# Altium PCB eMMC_SD.PcbDoc
Units mm, origin at the board's own origin, x right, y up, seen from the top; angles counter-clockwise.
Board outline 59.5 x 26 mm, 2 copper layers (Top Layer, Bottom Layer); 20 components, 17 nets, 152 pads, 31 vias.
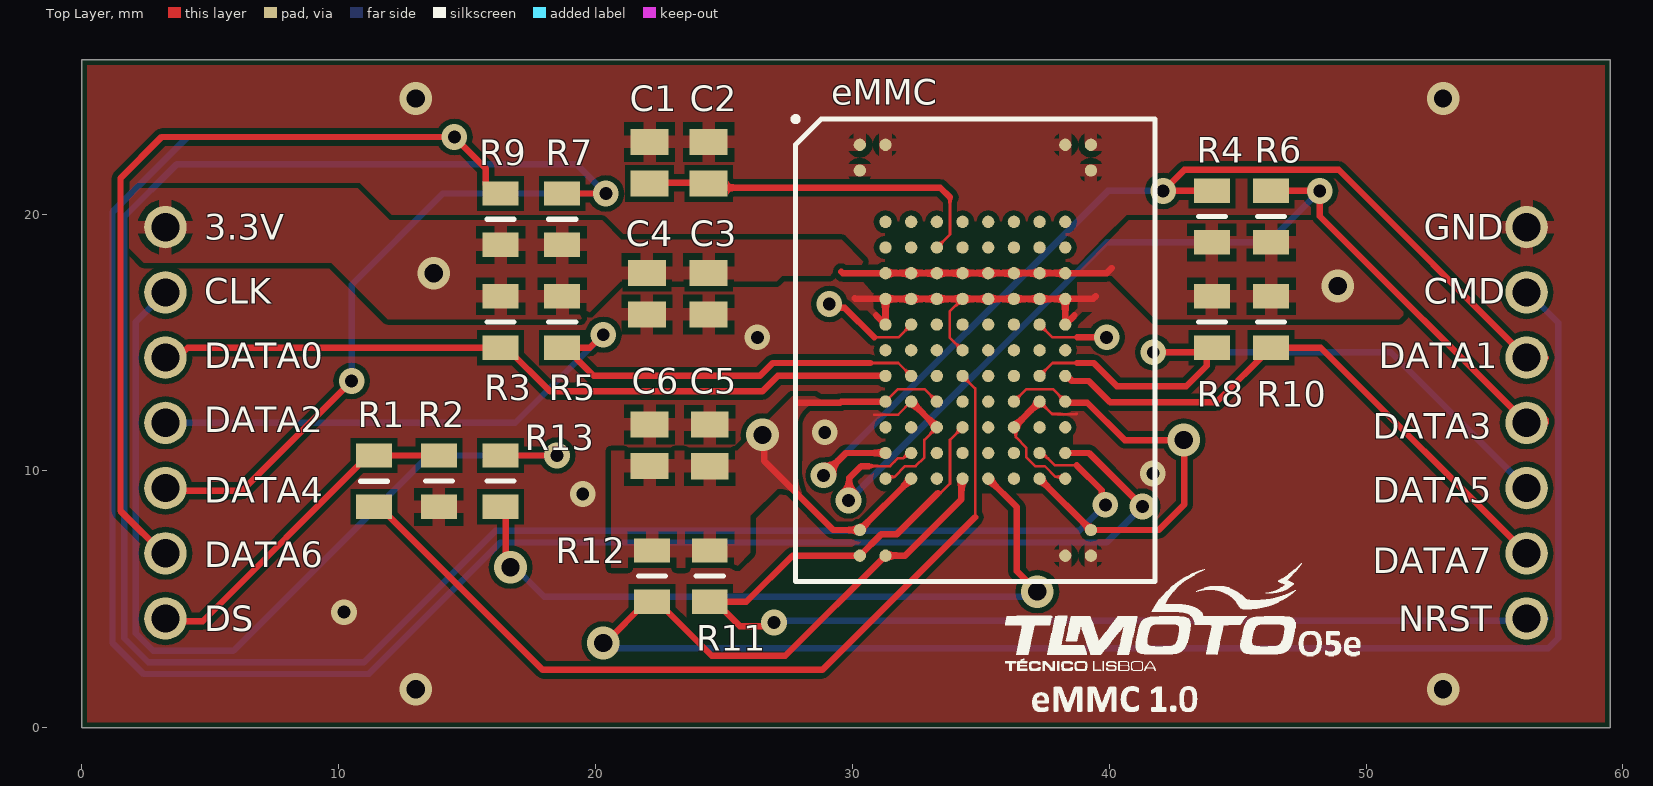
[diagram p0: Top Layer view]
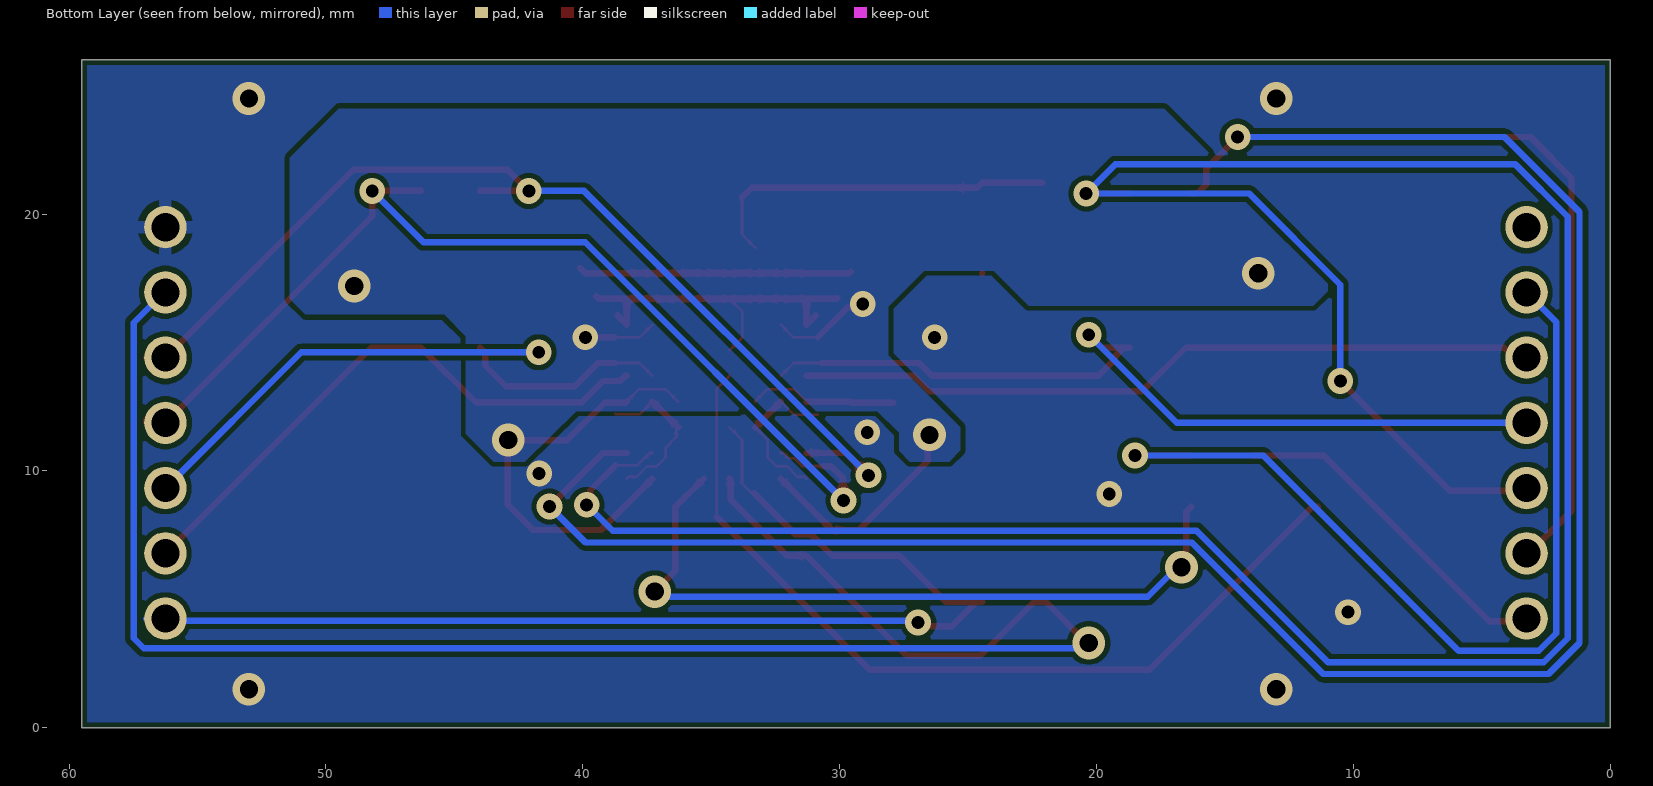
[diagram p1: Bottom Layer view, seen from below]
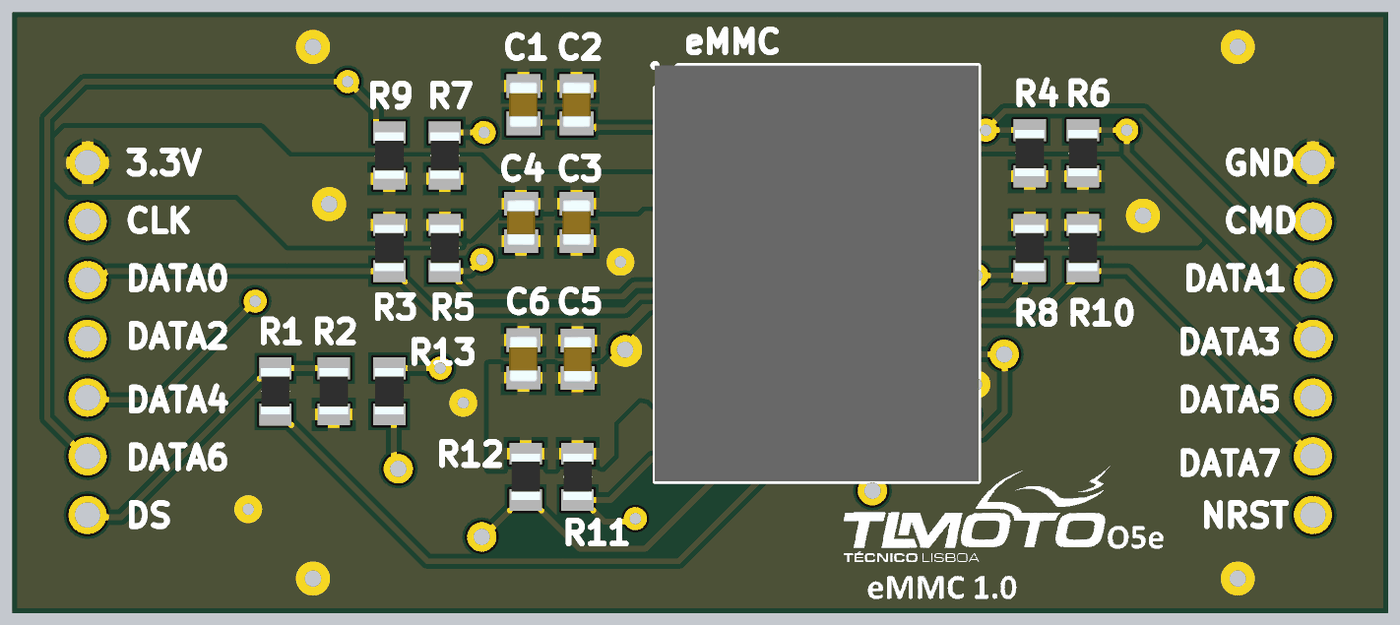
[diagram p2: 3D render of the assembled board from above, using the file's embedded part models]

## Layer stack, top to bottom
Top Solder: solder mask 0.0102, Solder Resist, Dk 3.5
Top Layer: signal copper 0.0356
Dielectric 1: dielectric 0.32, FR-4, Dk 4.8
Bottom Layer: signal copper 0.0356
Bottom Solder: solder mask 0.0102, Solder Resist, Dk 3.5

## Board outline
0,0 59.5,0 59.5,26 0,26

## Design rules (kind name [scope] priority, off if disabled: settings)
BoardOutlineClearance [All] p1: gap=0.2 ignorepadtopadclearanceinfootprint=FALSE except(0.4: Arc-SplitBarrior Arc-SplitContinuation Track-SplitBarrior Track-SplitContinuation SMDPad-SplitBarrior SMDPad-SplitContinuation THPad-SplitBarrior THPad-SplitContinuation Via-SplitBarrior Via-SplitContinuation Fill-SplitBarrior Fill-SplitContinuation Poly-SplitBarrior Poly-SplitContinuation Region-SplitBarrior Region-SplitContinuation Text-SplitBarrior Text-SplitContinuation)
Clearance "Clearance Bottom Layer" [OnLayer('Bottom Layer')] p1: gap=0.203 ignorepadtopadclearanceinfootprint=TRUE except(0.254: Arc-Text Track-Text SMDPad-Text THPad-Text Via-Text Fill-Text Poly-Text Region-Text Text-Text)
Clearance "Clearance Top Layer" [OnLayer('Top Layer')] p2: gap=0.203 ignorepadtopadclearanceinfootprint=TRUE except(0.196: Arc-SMDPad Track-SMDPad; 0.254: Arc-Text Track-Text SMDPad-Text THPad-Text Via-Text Fill-Text Poly-Text Region-Text Text-Text)
Clearance [All] p3: gap=0.2 ignorepadtopadclearanceinfootprint=FALSE except(0.089: Arc-Arc Arc-Track Arc-SMDPad Track-Track Track-SMDPad SMDPad-SMDPad; 0.127: Arc-Via Track-Via SMDPad-Via THPad-Via Via-Via; 0.254: Arc-Text Track-Text SMDPad-Text THPad-Text Via-Text Fill-Text Poly-Text Region-Text Text-Text)
DiffPairsRouting [All] p1: maxlimit=0.254 minlimit=0.254 mostfreqgap=0.254 toplayer_minwidth=0.25 toplayer_maxwidth=0.381 toplayer_prefwidth=0.381 bottomlayer_minwidth=0.25 bottomlayer_maxwidth=0.381 bottomlayer_prefwidth=0.381 maxuncoupledlength=12.7
HoleSize [All] p1: absolutevalues=TRUE maxlimit=6.3 minlimit=0.2 maxpercent=80.000 minpercent=20.000
MinimumAnnularRing [All] p1: minimumring=0.076
MinimumSolderMaskSliver [All] p1: minsoldermaskwidth=0.1
PolygonConnect PolygonConnect_1 [All] p1: thpad.connectstyle=Relief thpad.reliefconductorwidth=0.508 thpad.reliefentries=4 thpad.polygonreliefangle="90 Angle" thpad.airgapwidth=0.254 smdpad.connectstyle=Relief smdpad.reliefconductorwidth=0.508 smdpad.reliefentries=4 smdpad.polygonreliefangle="90 Angle" smdpad.airgapwidth=0.254 via.connectstyle=Direct via.reliefconductorwidth=0.508 via.reliefentries=4 via.polygonreliefangle="90 Angle" via.airgapwidth=0.254
RoutingCorners [All] p1: cornerstyle=Round minsetback=2.54 maxsetback=2.54
RoutingVias [All] p1: holewidth=0.5 width=1 viastyle="Through Hole" minholewidth=0.2 minwidth=0.45 maxholewidth=1 maxwidth=2
SilkToSilkClearance [All] p1: silktosilkclearance=0.1
SilkToSolderMaskClearance [IsPad] p1: minsilkscreentomaskgap=0.1 clearancetoexposedcopper=TRUE
SolderMaskExpansion [All] p1: expansion=0.102 istentingtop=FALSE
Width [All] p1: maxlimit=2.54 minlimit=0.1 preferedwidth=0.25 minimp=50.000000 maximp=50.000000 favimp=50.000000
24 further rules are at their usual default settings.

## Components (designator, comment, footprint, x,y, rotation, side; value= is the part's Value field where it differs from the comment)
C1 "100nF" CAPC2012X140N 22.1,22 r270 top
C2 "1uF" CAPC2012X140N 24.4,22 r270 top
C3 "100nF" CAPC2012X140N 24.4,16.9 r90 top
C4 "2.2uF" CAPC2012X140N 22,16.9 r90 top
C5 "100nF" CAPC2012X140N 24.445,10.99 r90 top
C6 "2.2uF" CAPC2012X140N 22.1,11 r90 top
eMMC "MTFC8GAMALNA-AAT_TR" BGA100C100P10X17_1400X1800X120 34.788,14.697 r0 top (schematic designator IC1)
R1 "22" RESC2012X60N 11.375,9.597 r90 top
R2 "50k" RESC2012X60N 13.9,9.6 r90 top
R3 "50k" RESC2012X60N 16.3,15.8 r90 top
R4 "50k" RESC2012X60N 44,19.9 r270 top
R5 "50k" RESC2012X60N 18.7,15.8 r90 top
R6 "50k" RESC2012X60N 46.3,19.9 r270 top
R7 "50k" RESC2012X60N 18.7,19.8 r270 top
R8 "50k" RESC2012X60N 44,15.8 r90 top
R9 "50k" RESC2012X60N 16.3,19.8 r270 top
R10 "50k" RESC2012X60N 46.3,15.8 r90 top
R11 "50k" RESC2012X60N 24.445,5.9 r90 top
R12 "10k" RESC2012X60N 22.2,5.9 r90 top
R13 "22" RESC2012X60N 16.3,9.6 r90 top

## Footprints (in the part's own frame and the unit in brackets; to place one, negate y for a bottom-side part, rotate by r counter-clockwise, add the part's x,y. Pads: shape width x height; smd on the part's side, far side on the other; paste and mask are expansions set on the pad)
BGA100C100P10X17_1400X1800X120 [mm]
  round 0.48 smd: A1(-4.5,8) A2(-3.5,8) A9(3.5,8) A10(4.5,8) B1(-4.5,7) B10(4.5,7) D2(-3.5,5) D3(-2.5,5) D4(-1.5,5) D5(-0.5,5) D6(0.5,5) D7(1.5,5) D8(2.5,5) D9(3.5,5) E2(-3.5,4) E3(-2.5,4) E4(-1.5,4) E5(-0.5,4) E6(0.5,4) E7(1.5,4) E8(2.5,4) E9(3.5,4) F2(-3.5,3) F3(-2.5,3) F4(-1.5,3) F5(-0.5,3) F6(0.5,3) F7(1.5,3) F8(2.5,3) F9(3.5,3) G2(-3.5,2) G3(-2.5,2) G4(-1.5,2) G5(-0.5,2) G6(0.5,2) G7(1.5,2) G8(2.5,2) G9(3.5,2) H2(-3.5,1) H3(-2.5,1) H4(-1.5,1) H5(-0.5,1) H6(0.5,1) H7(1.5,1) H8(2.5,1) H9(3.5,1) J2(-3.5,0) J3(-2.5,0) J4(-1.5,0) J5(-0.5,0) J6(0.5,0) J7(1.5,0) J8(2.5,0) J9(3.5,0) K2(-3.5,-1) K3(-2.5,-1) K4(-1.5,-1) K5(-0.5,-1) K6(0.5,-1) K7(1.5,-1) K8(2.5,-1) K9(3.5,-1) L2(-3.5,-2) L3(-2.5,-2) L4(-1.5,-2) L5(-0.5,-2) L6(0.5,-2) L7(1.5,-2) L8(2.5,-2) L9(3.5,-2) M2(-3.5,-3) M3(-2.5,-3) M4(-1.5,-3) M5(-0.5,-3) M6(0.5,-3) M7(1.5,-3) M8(2.5,-3) M9(3.5,-3) N2(-3.5,-4) N3(-2.5,-4) N4(-1.5,-4) N5(-0.5,-4) N6(0.5,-4) N7(1.5,-4) N8(2.5,-4) N9(3.5,-4) P2(-3.5,-5) P3(-2.5,-5) P4(-1.5,-5) P5(-0.5,-5) P6(0.5,-5) P7(1.5,-5) P8(2.5,-5) P9(3.5,-5) T1(-4.5,-7) T10(4.5,-7) U1(-4.5,-8) U2(-3.5,-8) U9(3.5,-8) U10(4.5,-8)
  silkscreen extent -7.1,-9 7,9.1, body extent -7,-9 7,9, height 1.2
CAPC2012X140N [mm]
  rect 1.02x1.47 smd: 1(-0.81,0) 2(0.81,0)
  body extent -1,-0.63 1,0.63, height 1.4
RESC2012X60N [mm]
  rect 0.95x1.4 smd: 1(-1,0) 2(1,0)
  silkscreen extent 0,-0.53 0,0.53, body extent -1,-0.63 1,0.63, height 0.6

## Part data
C1 C2 C3 C4 C5 C6: library part CMP-002-000003-1, "Capacitor", Arrow Part Number=08055C105K4Z2A, Manufacturer_Name="Kyocera AVX", Mouser Part Number=581-08055C105K4Z2A, Arrow Price/Stock=https://www.arrow.com/en/products/08055c105k4z2a/avx, Datasheet Link=https://4donline.ihs.com/images/VipMasterIC/IC/AVXC/AVXC-S-A0008637974/AVXC-S-A0008637974-1.pdf?hkey=6D3A4C79FDBF58556ACFDE234799DDF0, Design Item ID=08055C105K4Z2A, Height=1.4mm, Manufacturer_Part_Number=08055C105K4Z2A, Mouser Price/Stock=https://www.mouser.co.uk/ProductDetail/KYOCERA-AVX/08055C105K4Z2A?qs=0%2F2GmT7MRM8qZ4y6WMRpDA%3D%3D, Source=SamacSys.SchLib
eMMC: library part CMP-008-000016-1, "Multi Media Card Controller and NAND Flash e.MMC Memory", Arrow Part Number="MTFC8GAMALNA-AAT TR", Manufacturer_Name=Micron, Mouser Part Number=340-354324-REEL, Arrow Price/Stock=null?region=nac, Datasheet Link=https://kr.mouser.com/datasheet/2/671/micron_technology_mict-s-a0006806196-1-1759129.pdf, Design Item ID=MTFC8GAMALNA-AAT_TR, Height=1.2mm, Manufacturer_Part_Number="MTFC8GAMALNA-AAT TR", Mouser Price/Stock=https://www.mouser.co.uk/ProductDetail/Micron/MTFC8GAMALNA-AAT-TR?qs=j%252B1pi9TdxUZjqwVTwshsGQ%3D%3D, Source=SamacSys.SchLib
R1 R2 R3 R4 R5 R6 R7 R8 R9 R10 R11 R12 R13: library part CMP-010-000009-4, "Resistor", Design Item ID="R 0805 (2012)", Source=MotoLibrary.SchLib

## Free pads (board coordinates)
  round 1.65 hole 1.1: ""(3.25,4.25) ""(3.25,6.79) ""(3.25,9.33) ""(3.25,11.87) ""(3.25,14.41) ""(3.25,16.95) ""(3.25,19.49) ""(56.25,4.25) ""(56.25,6.79) ""(56.25,9.33) ""(56.25,11.87) ""(56.25,14.41) ""(56.25,16.95) ""(56.25,19.49)

## Via types
v1: diameter 1, hole 0.5, Top Layer to Bottom Layer, 20 vias
v2: diameter 1.27, hole 0.711, Top Layer to Bottom Layer, 11 vias

## Nets (pads, with @x,y where several pads share a name; then routed paths per layer and width w, separated by ;. In a path a pad name is that pad's centre, name@x,y a point inside that pad or via, vN(x,y) a via of type N, cw(c..) or ccw(c..) an arc to the next point about the centre after c; other vN are vias at no path point)
3.3V: C3.2 C4.2 C5.1 C6.1 eMMC.F2 eMMC.F3 eMMC.F4 eMMC.F5 eMMC.F6 eMMC.F7 eMMC.F8 eMMC.F9 eMMC.H3 eMMC.H8 eMMC.L2 eMMC.L4 eMMC.L7 eMMC.L9 eMMC.P3 eMMC.P8 eMMC.T1 eMMC.T10 pad.@3.25,19.49 R3.2 R4.2 R5.2 R6.2 R7.2 R8.2 R9.2 R10.2 R11.2 R12.2 | length 48.9
  Top Layer w0.1: 30.85,15.2 31.791,15.2 eMMC.H3 ; eMMC.L2 31.774,13.183 32.802,13.183 eMMC.L4 ; eMMC.L7 36.774,13.183 37.802,13.183 eMMC.L9 ; eMMC.H8 37.774,15.211 38.761,15.211
  Top Layer w0.25: v2(26.5,11.4) 26.56,11.34 26.56,10.39 29.253,7.697 eMMC.T1 eMMC.P3 ; 27.9,12.647 29.516,12.647 29.566,12.697 eMMC.L2 ; v1(29.1,16.5) 29.244,16.356 29.694,16.356 30.85,15.2 ; 29.561,17.758 29.622,17.697 eMMC.F2 ; eMMC.P8 eMMC.T10 41.928,7.697 42.923,8.692 42.923,11.177 v2(42.9,11.2) 40.6,11.2 39.147,12.653 38.332,12.653 eMMC.L9 ; eMMC.F9 39.897,17.697 40.1,17.9 ; 38.761,15.211 39.889,15.211 v1(39.9,15.2)
  Top Layer w0.254: eMMC.F2 eMMC.F3 eMMC.F4 eMMC.F5 eMMC.F6 eMMC.F7 eMMC.F8 eMMC.F9
  other v2: 48.9,17.2 13.7,17.7
CLK: pad.@3.25,16.95 R13.2 | length 35.8
  Top Layer w0.25: R13.2 v1(18.5,10.6)
  Bottom Layer w0.25: pad.@3.25,16.95 2.097,15.797 2.097,3.672 2.772,2.997 5.897,2.997 13.5,10.6 v1(18.5,10.6)
CMD: eMMC.P5 eMMC.U2 pad.@56.25,16.95 R12.1 | length 70.2
  Top Layer w0.25: v2(20.3,3.3) 20.375,3.3 21.975,4.9 R12.1 22.425,4.9 24.527,2.798 27.389,2.798 eMMC.U2 32.047,6.697 34.244,8.894 34.244,9.653 eMMC.P5
  Bottom Layer w0.25: v2(20.3,3.3) 20.576,3.3 20.779,3.097 57.097,3.097 57.478,3.478 57.478,15.772 pad.@56.275,16.975
DATA0: eMMC.K2 pad.@3.25,14.41 R3.1 | length 29.2
  Top Layer w0.25: pad.@3.25,14.31 3.629,14.31 4.119,14.8 R3.1 16.525,14.8 18.225,13.1 26.5,13.1 27.097,13.697 eMMC.K2
DATA1: eMMC.N2 pad.@56.25,14.41 R4.1 | length 40.7
  Top Layer w0.25: v1(28.875,9.825) 29.747,10.697 eMMC.N2 ; R4.1 v1(42.1,20.9) 42.928,21.728 48.932,21.728 pad.@56.25,14.41 ; pad.@56.625,14.785 pad.@57,14.41
  Bottom Layer w0.25: v1@28.681,9.825 v1(28.875,9.825) 39.95,20.9 v1(42.1,20.9)
DATA2: eMMC.K3 pad.@3.25,11.87 R5.1 | length 34.6
  Top Layer w0.1: 30.7,14.2 31.785,14.2 eMMC.K3
  Top Layer w0.25: R5.1 R5.1@18.925,14.8 ; v1(20.3,15.3) 20.275,15.3 19.775,14.8 R5.1@18.925,14.8 ; 30.7,14.2 26.9,14.2 26.4,13.7 19.921,13.7 19.275,14.346 19.275,14.45 R5.1@18.925,14.8
  Bottom Layer w0.25: pad.@3.25,11.87 16.87,11.87 v1(20.3,15.3)
DATA3: eMMC.N3 pad.@56.25,11.87 R6.1 | length 41.9
  Top Layer w0.1: 30.639,10.186 31.463,10.186 31.608,10.331 ccw(c31.288,10.697) 31.654,10.377 31.763,10.486 31.974,10.486 32.185,10.697 eMMC.N3
  Top Layer w0.25: v1(29.85,8.85) 29.875,8.875 29.875,9.725 30.336,10.186 30.639,10.186 ; R6.1 v1(48.2,20.9) 48.2,19.92 pad.@56.25,11.87 ; pad.@56.683,12.302 57,11.985 pad.@57,11.87
  Bottom Layer w0.25: v1(29.85,8.85) 39.9,18.9 46.2,18.9 v1(48.2,20.9)
DATA4: eMMC.N8 pad.@3.25,9.33 R7.1 | length 107.1
  Top Layer w0.1: eMMC.N8 37.391,10.697 37.602,10.486 37.615,10.486 37.89,10.211 38.736,10.211
  Top Layer w0.25: pad.@3.25,9.23 6.23,9.23 v1(10.5,13.5) ; R7.1 v1(20.4,20.8) ; 38.736,10.211 39.706,9.241 39.706,8.819 v1(39.85,8.675)
  Bottom Layer w0.25: v1(10.5,13.5) 10.5,17.25 14.05,20.8 v1(20.4,20.8) 19.267,21.933 3.683,21.933 1.644,19.894 1.644,3.485 2.585,2.544 10.981,2.544 16.101,7.663 38.838,7.663 v1(39.85,8.675)
DATA5: eMMC.K8 pad.@56.25,9.33 R8.1 | length 27
  Top Layer w0.1: eMMC.K8 37.791,14.2 38.758,14.2
  Top Layer w0.25: 38.758,14.2 39.4,14.2 40.3,13.3 43,13.3 43.796,14.096 43.796,14.596 R8.1@43.816,14.616 ; v1(41.715,14.616) R8.1@43.816,14.616 ; R8.1 R8.1@43.816,14.616
  Bottom Layer w0.25: v1(41.715,14.616) 50.964,14.616 pad.@56.25,9.33
DATA6: eMMC.N9 pad.@3.25,6.79 R9.1 | length 110.7
  Top Layer w0.25: pad.@3.25,6.69 1.5,8.44 1.5,21.4 3.1,23 v1(14.5,23) 15.725,21.775 15.725,21.15 16.075,20.8 R9.1 ; eMMC.N9 39.213,10.697 v1(41.296,8.614)
  Bottom Layer w0.25: v1(14.5,23) 4.109,23 1.19,20.081 1.19,3.297 2.397,2.09 11.169,2.09 16.289,7.21 39.891,7.21 v1(41.296,8.614)
DATA7: eMMC.K9 pad.@56.25,6.79 R10.1 | length 22.6
  Top Layer w0.25: eMMC.K9 38.35,13.697 38.547,13.5 39.2,13.5 40.032,12.668 44.168,12.668 R10.1 48.24,14.8 pad.@56.25,6.79
DS: pad.@3.25,4.25 R1.2 R2.2 | length 13.3
  Top Layer w0.25: pad.@3.25,4.15 4.703,4.15 11.15,10.597 R1.2 ; R1.2@11.375,10.6 R2.2
GND: C1.1 C2.1 C3.1 C4.1 C5.2 C6.2 eMMC.A1 eMMC.A2 eMMC.A9 eMMC.A10 eMMC.B1 eMMC.B10 eMMC.G2 eMMC.G3 eMMC.G4 eMMC.G5 eMMC.G6 eMMC.G7 eMMC.G8 eMMC.G9 eMMC.H2 eMMC.H9 eMMC.J5 eMMC.L3 eMMC.L8 eMMC.M4 eMMC.M7 eMMC.P2 eMMC.P9 eMMC.U9 eMMC.U10 pad.@56.25,19.49 R2.1 | length 27.4
  Top Layer w0.1: 30.85,12.194 31.785,12.194 eMMC.L3 ; eMMC.P2 31.361,9.77 31.631,9.77 32.044,10.183 32.461,10.183 32.802,10.524 32.802,11.211 eMMC.M4 ; eMMC.J5 33.788,15.197 33.788,16.197 eMMC.G5 ; eMMC.M7 36.361,11.624 36.361,11.312 36.774,10.898 36.774,10.524 37.115,10.183 37.489,10.183 37.903,9.77 38.215,9.77 eMMC.P9 ; eMMC.L8 37.774,12.211 38.711,12.211 38.725,12.225
  Top Layer w0.25: 30.094,16.717 30.114,16.697 eMMC.G2 ; 30.932,16.053 eMMC.H2 ; eMMC.H9 38.644,16.053 ; eMMC.G9 39.371,16.697 39.467,16.793
  Top Layer w0.254: eMMC.H2 eMMC.G2 eMMC.G3 eMMC.G4 eMMC.G5 eMMC.G6 eMMC.G7 eMMC.G8 eMMC.G9 eMMC.H9 ; eMMC.L3 eMMC.M4 ; eMMC.M7 eMMC.L8
  other v1: 10.2,4.5 19.5,9.1 41.7,9.9 28.925,11.5 26.3,15.2
  other v2: 13,1.5 53,1.5 13,24.5 53,24.5
NetC1_2: C1.2 C2.2 eMMC.E4 | length 14.1
  Top Layer w0.1: eMMC.E4 33.8,19.209 33.8,20.65
  Top Layer w0.25: C1.2@22.1,21.225 24.445,21.225 24.645,21.025 33.425,21.025 33.8,20.65
NetIC1_K5: eMMC.K5 R1.1 | length 34.2
  Top Layer w0.1: eMMC.K5 34.775,13.21 34.775,8.2
  Top Layer w0.25: R1.1 11.6,8.597 17.947,2.25 28.825,2.25 34.775,8.2
NetIC1_P6: eMMC.P6 R13.1 | length 28.8
  Top Layer w0.25: R13.1 16.5,8.4 16.5,6.435 v2(16.688,6.247) ; eMMC.P6 36.405,8.58 36.405,6.095 v2(37.2,5.3)
  Bottom Layer w0.25: v2(16.688,6.247) 16.853,6.247 18,5.1 36.724,5.1 36.924,5.3 v2(37.2,5.3)
NRST: eMMC.M5 eMMC.U1 pad.@56.25,4.25 R11.1 | length 46.5
  Top Layer w0.1: 33.331,9.138 33.437,9.138 33.8,9.5 33.8,11.209 eMMC.M5
  Top Layer w0.25: R11.1 R11.1@24.67,4.9 ; v1(26.945,4.093) 26.809,3.957 25.613,3.957 R11.1@24.67,4.9 ; 33.331,9.138 31.719,7.525 31.116,7.525 eMMC.U1 27.669,6.697 25.872,4.9 R11.1@24.67,4.9
  Bottom Layer w0.25: v1(26.945,4.093) 27.023,4.172 56.172,4.172 56.25,4.25 pad.@57,4.25
pads on no net: eMMC.D2 eMMC.D3 eMMC.D4 eMMC.D5 eMMC.D6 eMMC.D7 eMMC.D8 eMMC.D9 eMMC.E2 eMMC.E3 eMMC.E5 eMMC.E6 eMMC.E7 eMMC.E8 eMMC.E9 eMMC.H4 eMMC.H5 eMMC.H6 eMMC.H7 eMMC.J2 eMMC.J3 eMMC.J4 eMMC.J6 eMMC.J7 eMMC.J8 eMMC.J9 eMMC.K4 eMMC.K6 eMMC.K7 eMMC.L5 eMMC.L6 eMMC.M2 eMMC.M3 eMMC.M6 eMMC.M8 eMMC.M9 eMMC.N4 eMMC.N5 eMMC.N6 eMMC.N7 eMMC.P4 eMMC.P7

## Polygon pours and split planes (outlines as drawn)
GND on Top Layer "Top Layer-GND" (solid, remove dead copper, pour order 74): 0,0 59.5,0 59.5,26 0,26
3.3V on Top Layer "Top Layer-3.3V 2" (solid, pour order 73): 1.75,18.75 2.4,18.1 9.705,18.1 11.905,15.9 19.5,15.9 20.975,17.375 27.046,17.375 27.268,17.599 30.794,17.599 30.794,17.581 31,17.375 31.31,17.685 30.997,17.998 30.794,17.795 30.768,17.795 29.586,19 21,19 20.25,19.75 11.984,19.75 10.734,21 2.25,21 1.75,20.5
3.3V on Top Layer "Top Layer-3.3V" (solid, pour order 72): 48.744,19.756 51.7,16.8 51.7,16.304 51.3,15.906 41.788,15.906 40.106,17.605 38.81,17.605 38.81,17.587 38.604,17.381 38.294,17.691 38.607,18.004 38.81,17.801 38.836,17.801 40.018,19.006 40.768,19.756
3.3V on Top Layer "Top Layer-3.3V 1" (solid, remove dead copper, pour order 71): 27.65,12.9 28.533,12.9 ccw(c29.176,13.775) 29.37,12.707 cw(c28.932,13.789) 28.675,12.65 ccw(c28.772,11.738) 27.86,11.835 27.86,10.5 ccw(c30.551,10.146) 28.132,8.915 ccw(c27.005,7.49) 27.86,9.093 ccw(c29.899,9.963) 27.922,8.96 27.694,9.172 ccw(c26.99,7.469) 27.084,9.309 26.025,8.25 26.025,6.808 25.442,6.225 20.6,6.225 20.6,10.775 25.525,10.775
GND on Bottom Layer "GND_L02_P076" (solid, pour order 76): 0,26 59.5,26 59.5,0 0,0
3.3V on Bottom Layer "Bottom Layer-3.3V" (solid, remove dead copper, pour order 75): 22.637,16.437 24,17.8 26.7,17.8 28.1,16.4 28.1,14.5 25.3,11.7 25.3,10.8 25.738,10.362 27.262,10.362 27.675,10.775 27.675,11.475 28.55,12.35 28.575,12.325 40.245,12.325 42.256,10.362 43.462,10.362 44.55,11.45 44.55,15.25 45.4,16.1 50.8,16.1 51.4,16.7 51.4,22.2 49.5,24.1 17.35,24.1 11,17.75 11,17 11.563,16.437

## Other copper
Top Layer:
  pour cut-out: 38.759,16.496 38.759,16.333 38.546,16.12 38.435,16.12 38.322,16.233
  pour cut-out: 38.64,15.559 38.64,15.874 38.951,16.185 39.31,16.185
  pour cut-out: 30.825,16.498 30.825,16.334 31.038,16.121 31.15,16.121 31.263,16.234
  pour cut-out: 30.255,16.24 30.571,16.24 30.882,15.929 30.882,15.675 30.831,15.625
  pour cut-out: 38.052,16.8 38.729,16.926 38.729,17.478 38.052,17.706
  pour cut-out: 38.052,16.8 36.959,16.8 38.052,17.706
  pour cut-out: 31.472,16.811 30.795,16.936 30.415,17.365 31.472,17.717
  pour cut-out: 31.472,16.811 32.564,16.811 31.472,17.717
  pour cut-out: 31.8,12.285 31.117,12.285 31.8,12.851
  pour cut-out: 31.803,12.144 31.256,12.144 31.803,11.578
  pour cut-out: 37.773,12.164 38.461,12.114 37.773,11.598
  pour cut-out: 37.774,12.28 38.461,12.28 37.774,12.846
  pour cut-out: 31.288,17.697 31.305,17.68 31.322,17.697 38.288,17.697 38.288,18.697 31.288,18.697
  pour cut-out: 31.288,18.697 38.288,18.697 38.288,19.697 31.288,19.697
  pour cut-out: 31.288,10.697 32.288,10.697 32.288,11.697 31.288,11.697
  pour cut-out: 34.742,9.122 38.756,9.122 38.832,9.198 38.608,9.423 38.608,11.377 38.363,11.377 37.672,12.069 35.962,12.069 34.788,10.211 34.742,10.165
  pour cut-out: 31.288,9.697 31.802,10.211 37.774,10.211 37.774,19.125 31.288,19.125
  pour cut-out: 27.06,9.76 27.061,9.761

## Silkscreen, mask and mechanical layers (free items; w line width, h text height)
Top Overlay:
  drawing of 37 lines, arcs and shapes, not listed
  text "3.3V" at 4.754,19.004 h1
  text "GND" at 52.254,19.004 h1
  text "CLK" at 4.754,16.504 h1
  text "CMD" at 52.254,16.504 h1
  text "DATA0" at 4.754,14.004 h1
  text "DATA1" at 50.504,14.004 h1
  text "DATA2" at 4.754,11.504 h1
  text "DATA3" at 50.254,11.254 h1
  text "DATA4" at 4.754,8.754 h1
  text "DATA5" at 50.254,8.754 h1
  text "DATA6" at 4.754,6.254 h1
  text "DATA7" at 50.254,6.004 h1
  text "DS" at 4.754,3.754 h1
  text "NRST" at 51.254,3.754 h1
Mechanical 1:
  the board outline again, w0.254

## Dimensions
56.25,4.25 to 59.5,0 on Mechanical 1
56.25,19.49 to 59.5,26 on Mechanical 1
3.25,4.25 to 0,0 on Mechanical 1
3.25,19.49 to 0,26 on Mechanical 1
27.75,23.75 to 41.788,23.697 on Mechanical 1
59.5,-7.5 to 56.25,-13 on Mechanical 1
0,-7.5 to 3.25,-13 on Mechanical 1
3.25,4.25 to 56.25,4.25 on Mechanical 1
0,26 to 0,0 on Mechanical 1
0,0 to 59.5,0 on Mechanical 1